# Altium PCB Memory Address Decoder.PcbDoc
Units mil, origin at the board's own origin, x right, y up, seen from the top; angles counter-clockwise.
Board outline 5200 x 2700 mil, 2 copper layers (Top Layer, Bottom Layer); 11 components, 64 nets, 176 pads, 0 vias.
Unrouted connection lines stored in the file: 84.
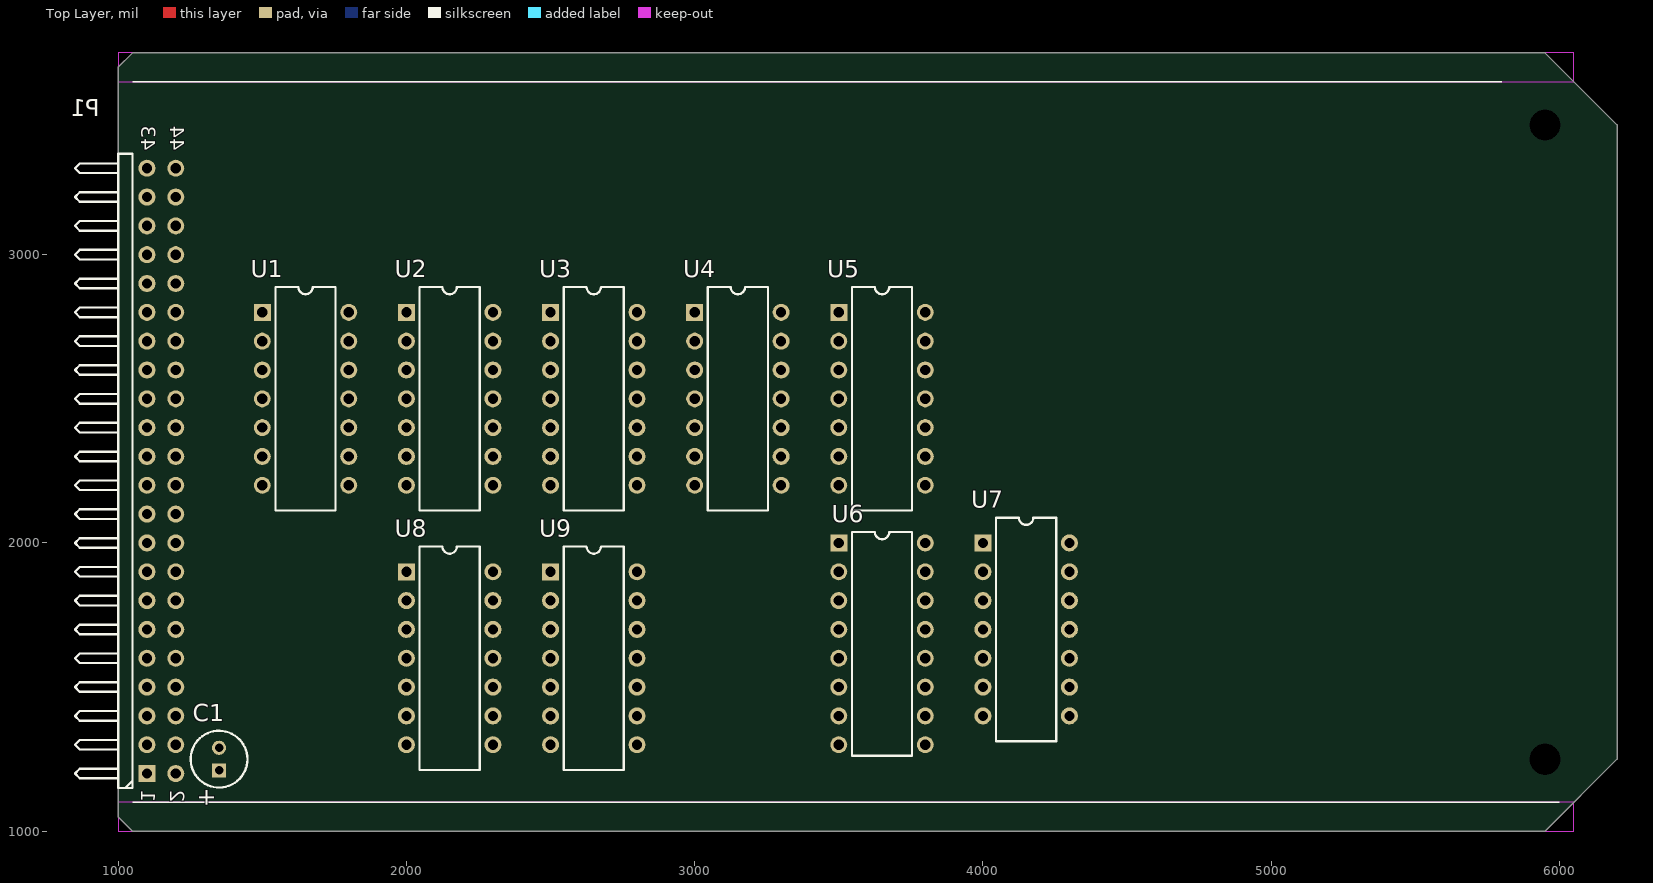
[diagram p0: Top Layer view]
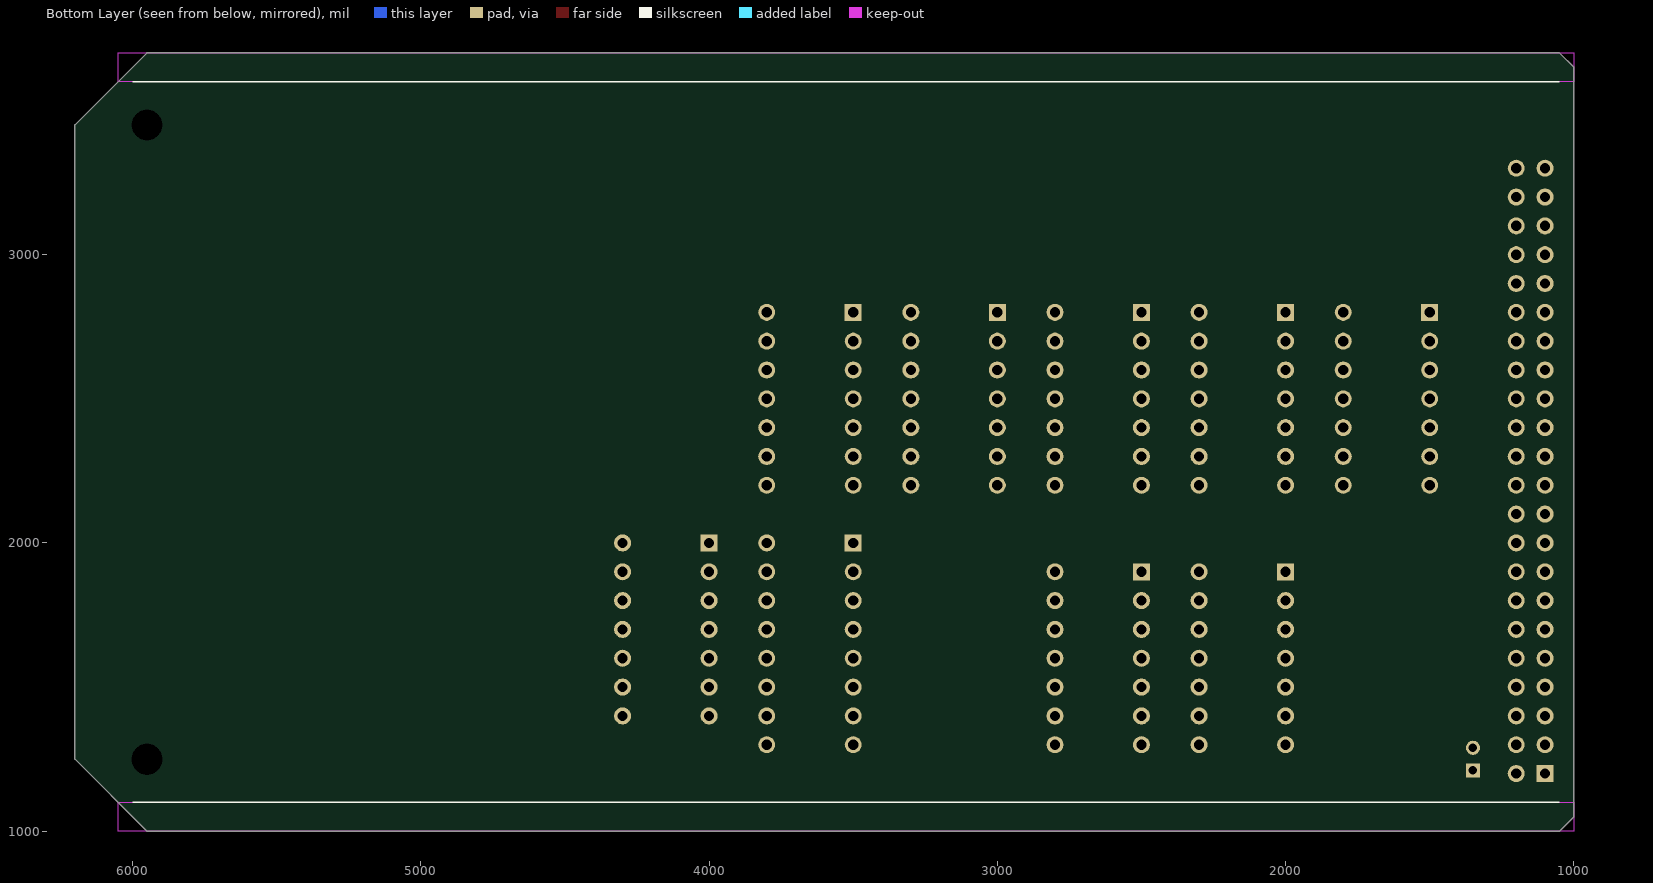
[diagram p1: Bottom Layer view, seen from below]

## Layer stack, top to bottom
Top Solder: solder mask 0.4, Solder Resist, Dk 3.5
Top Layer: signal copper 1.4
Dielectric 1: dielectric 12.6, FR-4, Dk 4.8
Bottom Layer: signal copper 1.4
Bottom Solder: solder mask 0.4, Solder Resist, Dk 3.5

## Board outline
1000,3650 1050,3700 5950,3700 6200,3450 6200,1250 5950,1000 1050,1000 1000,1050

## Design rules (kind name [scope] priority, off if disabled: settings)
Clearance [All] p1: gap=10 ignorepadtopadclearanceinfootprint=FALSE except(0: Arc-Hole Track-Hole SMDPad-Hole THPad-Hole Via-Hole Fill-Hole Poly-Hole Region-Hole Text-Hole)
PolygonConnect [All] p1: connectstyle=Relief reliefconductorwidth=10 reliefentries=4 polygonreliefangle="90 Angle" airgapwidth=10
RoutingVias "Schematic Routing Via Style" [InNetClass('PWR')] p1: holewidth=20 width=35 viastyle="Through Hole" minholewidth=20 minwidth=35 maxholewidth=20 maxwidth=50
RoutingVias [All] p2: holewidth=28 width=50 viastyle="Through Hole" minholewidth=28 minwidth=50 maxholewidth=28 maxwidth=50
SolderMaskExpansion [All] p1: expansion=4 istentingtop=FALSE
Width "Schematic Width Constraint" [InNetClass('PWR')] p1: maxlimit=50 minlimit=20 preferedwidth=20
Width [All] p2: maxlimit=10 minlimit=10 preferedwidth=10
30 further rules are at their usual default settings.

## Classes and differential pairs
net class PWR: GND VCC
net class ENN[5..12]: ENN5 ENN6 ENN7 ENN8 ENN9 ENN10 ENN11 ENN12
net class EN[1..20]: EN1 EN2 EN3 EN4 EN5 EN6 EN7 EN8 EN9 EN10 EN11 EN12 EN13 EN14 EN15 EN16 EN17 EN18 EN19 EN20
net class ADDR[0..19]: ADDR0 ADDR1 ADDR2 ADDR3 ADDR4 ADDR5 ADDR6 ADDR7 ADDR8 ADDR9 ADDR10 ADDR11 ADDR12 ADDR13 ADDR14 ADDR15 ADDR16 ADDR17 ADDR18 ADDR19
component class Top: C1 P1
component class Decode: U1 U2 U3 U4 U5 U6 U7 U8 U9

## Components (designator, comment, footprint, x,y, rotation, side; value= is the part's Value field where it differs from the comment)
C1 "Cap Pol5" C5x7 1350,1250 r90 top value=10uF
P1 "Memory Address Decoder" HDR2X22H 1100,1200 r90 top
U1 "SN74LS04N" N014 1650,2500 r270 top
U2 "SN74LS08N" N014 2150,2500 r270 top
U3 "SN74LS08N" N014 2650,2500 r270 top
U4 "SN74LS08N" N014 3150,2500 r270 top
U5 "SN74LS32N" N014 3650,2500 r270 top
U6 "SN74LS138N" N016 3650,1650 r270 top
U7 "SN74LS04N" N014 4150,1700 r270 top
U8 "SN74LS04N" N014 2150,1600 r270 top
U9 "SN74LS30N" N014 2650,1600 r270 top

## Footprints (in the part's own frame and the unit in brackets; to place one, negate y for a bottom-side part, rotate by r counter-clockwise, add the part's x,y. Pads: shape width x height; smd on the part's side, far side on the other; paste and mask are expansions set on the pad)
C5x7 [mm] "Capacitor; 2 Leads"
  rect 1.25x1.25 hole 0.75: 1(-1,0)
  round 1.25 hole 0.75: 2(1,0)
  silkscreen extent -2.5,-2.5 2.5,2.5, body extent -2.5,-2.5 2.5,2.5, height 7
HDR2X22H [mm] "Connector; Header; 22x2 Position; Right Angle"
  rect 1.5x1.5 hole 0.9: 1(0,0)
  round 1.5 hole 0.9: 2(0,-2.54) 3(2.54,0) 4(2.54,-2.54) 5(5.08,0) 6(5.08,-2.54) 7(7.62,0) 8(7.62,-2.54) 9(10.16,0) 10(10.16,-2.54) 11(12.7,0) 12(12.7,-2.54) 13(15.24,0) 14(15.24,-2.54) 15(17.78,0) 16(17.78,-2.54) 17(20.32,0) 18(20.32,-2.54) 19(22.86,0) 20(22.86,-2.54) 21(25.4,0) 22(25.4,-2.54) 23(27.94,0) 24(27.94,-2.54) 25(30.48,0) 26(30.48,-2.54) 27(33.02,0) 28(33.02,-2.54) 29(35.56,0) 30(35.56,-2.54) 31(38.1,0) 32(38.1,-2.54) 33(40.64,0) 34(40.64,-2.54) 35(43.18,0) 36(43.18,-2.54) 37(45.72,0) 38(45.72,-2.54) 39(48.26,0) 40(48.26,-2.54) 41(50.8,0) 42(50.8,-2.54) 43(53.34,0) 44(53.34,-2.54)
  silkscreen extent -1.27,1.27 54.61,6.35
N014 [mm] "DIP; 14 Leads; Row Spacing 7.62 mm; Pitch 2.54 mm"
  rect 1.5x1.5 hole 0.9: 1(-7.62,-3.81)
  round 1.5 hole 0.9: 2(-5.08,-3.81) 3(-2.54,-3.81) 4(0,-3.81) 5(2.54,-3.81) 6(5.08,-3.81) 7(7.62,-3.81) 8(7.62,3.81) 9(5.08,3.81) 10(2.54,3.81) 11(0,3.81) 12(-2.54,3.81) 13(-5.08,3.81) 14(-7.62,3.81)
  silkscreen extent -9.85,-2.65 9.85,2.65, body extent -9.15,-5.08 9.15,5.12, height 7.88
N016 [mm] "DIP; 16 Leads; Row Spacing 7.62 mm; Pitch 2.54 mm"
  rect 1.5x1.5 hole 0.9: 1(-8.89,-3.81)
  round 1.5 hole 0.9: 2(-6.35,-3.81) 3(-3.81,-3.81) 4(-1.27,-3.81) 5(1.27,-3.81) 6(3.81,-3.81) 7(6.35,-3.81) 8(8.89,-3.81) 9(8.89,3.81) 10(6.35,3.81) 11(3.81,3.81) 12(1.27,3.81) 13(-1.27,3.81) 14(-3.81,3.81) 15(-6.35,3.81) 16(-8.89,3.81)
  silkscreen extent -9.85,-2.65 9.85,2.65

## Part data
C1: "Polarized Capacitor", LatestRevisionDate=17-Jul-2002, LatestRevisionNote="Re-released for DXP Platform.", PackageDescription="Polarized Capacitor; 2 Leads", PackageReference=POLAR0.8, Published=8-Jun-2000, Publisher="Altium Limited"
P1: library part "Header 22X2H", "Header, 22-Pin, Dual row, Right Angle", LatestRevisionDate=17-Jul-2002, LatestRevisionNote="Re-released for DXP Platform.", Publisher="Altium Limited", System=Connector
U1 U7 U8: "Hex Inverter", ComponentLink1Description="Manufacturer Link", ComponentLink1URL=http://www.ti.com/, ComponentLink2Description=Datasheet, ComponentLink2URL=http://www-s.ti.com/sc/ds/sn74ls04.pdf, DatasheetVersion=Mar-1988, LatestRevisionDate=04-Mar-2005, LatestRevisionNote="Stylized 3D Model Added.", PackageDescription="DIP; 14 Leads; Row Spacing 7.62 mm; Pitch 2.54 mm", PackageReference=N014, PackageVersion=Oct-1995, Published=8-Jun-2000, Publisher="Altium Limited"
U2 U3 U4: "Quadruple 2-Input Positive-AND Gate", ComponentLink1Description="Manufacturer Link", ComponentLink1URL=http://www.ti.com/, ComponentLink2Description=Datasheet, ComponentLink2URL=http://www-s.ti.com/sc/ds/SN74LS08.pdf, DatasheetVersion=Mar-1988, LatestRevisionDate=04-Mar-2005, LatestRevisionNote="Stylized 3D Model Added.", PackageDescription="DIP; 14 Leads; Row Spacing 7.62 mm; Pitch 2.54 mm", PackageReference=N014, PackageVersion=Oct-1995, Published=8-Jun-2000, Publisher="Altium Limited"
U5: "Quadruple 2-Input Positive-OR Gate", ComponentLink1Description="Manufacturer Link", ComponentLink1URL=http://www.ti.com/, ComponentLink2Description=Datasheet, ComponentLink2URL=http://www-s.ti.com/sc/ds/sn74ls32.pdf, DatasheetVersion=Mar-1988, LatestRevisionDate=04-Mar-2005, LatestRevisionNote="Stylized 3D Model Added.", PackageDescription="DIP; 14 Leads; Row Spacing 7.62 mm; Pitch 2.54 mm", PackageReference=N014, PackageVersion=Oct-1995, Published=8-Jun-2000, Publisher="Altium Limited"
U6: "3-Line to 8-Line Decoder / Demultiplexer", Code_JEDEC=MS-001-BB, ComponentLink1Description="Manufacturer Link", ComponentLink1URL=http://www.ti.com/, ComponentLink2Description=Datasheet, ComponentLink2URL=http://www-s.ti.com/sc/ds/sn74ls138.pdf, DatasheetVersion=Mar-1988, LatestRevisionDate=04-Mar-2005, LatestRevisionNote="Stylized 3D Model Added.", PackageDescription="DIP; 16 Leads; Row Spacing 7.62 mm; Pitch 2.54 mm", PackageReference=N016, PackageVersion=Oct-1995, Published=8-Jun-2000, Publisher="Altium Limited"
U9: "8-Input Positive-NAND Gate", ComponentLink1Description="Manufacturer Link", ComponentLink1URL=http://www.ti.com/, ComponentLink2Description=Datasheet, ComponentLink2URL=http://www-s.ti.com/sc/ds/sn74s30.pdf, DatasheetVersion=Mar-1988, LatestRevisionDate=04-Mar-2005, LatestRevisionNote="Stylized 3D Model Added.", Note="Pins 9, 10  and 13 are NC & not drawn.", PackageDescription="DIP; 14 Leads; Row Spacing 7.62 mm; Pitch 2.54 mm", PackageReference=N014, PackageVersion=Oct-1995, Published=8-Jun-2000, Publisher="Altium Limited"

## Free pads (board coordinates)
  round 0 hole 109: ""(5950,1250) ""(5950,3450)

## Nets (pads, with @x,y where several pads share a name; then routed paths per layer and width w, separated by ;. In a path a pad name is that pad's centre, name@x,y a point inside that pad or via, vN(x,y) a via of type N, cw(c..) or ccw(c..) an arc to the next point about the centre after c; other vN are vias at no path point)
ADDR0: P1.6
ADDR1: P1.8
ADDR2: P1.10
ADDR3: P1.12
ADDR4: P1.14
ADDR5: P1.16
ADDR6: P1.18
ADDR7: P1.20 U6.1
ADDR8: P1.22 U6.2
ADDR9: P1.24 U6.3
ADDR10: P1.26 U1.13 U9.6
ADDR11: P1.28 U1.11 U3.13 U9.5
ADDR12: P1.30 U1.9 U3.2 U9.4
ADDR13: P1.32 U1.5 U2.13 U9.3
ADDR14: P1.34 U1.3 U2.2 U9.2
ADDR15: P1.36 U1.1 U2.1 U2.9 U9.1
ADDR16: P1.38
ADDR17: P1.40
ADDR18: P1.42
ADDR19: P1.44
EN1: P1.5 U1.2
EN2: P1.7 U5.6
EN3: P1.9 U3.6
EN4: P1.11 U4.3
EN5: P1.13 U7.2
EN6: P1.15 U7.4
EN7: P1.17 U7.6
EN8: P1.19 U7.8
EN9: P1.21 U7.10
EN10: P1.23 U7.12
EN11: P1.25 U8.2
EN12: P1.27 U8.4
EN13: P1.29
EN14: P1.31
EN15: P1.33
EN16: P1.35
EN17: P1.37
EN18: P1.39
EN19: P1.41
EN20: P1.43
ENN5: U6.15 U7.1
ENN6: U6.14 U7.3
ENN7: U6.13 U7.5
ENN8: U6.12 U7.9
ENN9: U6.11 U7.11
ENN10: U6.10 U7.13
ENN11: U6.9 U8.1
ENN12: U6.7 U8.3
GND: C1.2 P1.3 P1.4 U1.7 U2.7 U3.7 U4.7 U5.7 U6.5 U6.8 U7.7 U8.7 U9.7
NetU1_4: U1.4 U2.10
NetU1_6: U1.6 U2.5
NetU1_8: U1.8 U3.10
NetU1_10: U1.10 U3.5
NetU1_12: U1.12 U4.2
NetU2_3: U2.3 U2.4 U2.12
NetU2_6: U2.6 U5.2
NetU2_8: U2.8 U5.1
NetU2_11: U2.11 U3.1 U3.9
NetU3_3: U3.3 U3.4 U3.12
NetU3_8: U3.8 U5.5
NetU3_11: U3.11 U4.1
NetU5_3: U5.3 U5.4
NetU6_4: U6.4 U9.8
VCC: C1.1 P1.1 P1.2 U1.14 U2.14 U3.14 U4.14 U5.14 U6.6 U6.16 U7.14 U8.14 U9.11 U9.12 U9.14
pads on no net: U4.4 U4.5 U4.6 U4.8 U4.9 U4.10 U4.11 U4.12 U4.13 U5.8 U5.9 U5.10 U5.11 U5.12 U5.13 U8.5 U8.6 U8.8 U8.9 U8.10 U8.11 U8.12 U8.13 U9.9 U9.10 U9.13

## Keep-outs
Top Layer:
  rectangle: 1000,1000 6050,1100
  rectangle: 1000,3600 6050,3700
Bottom Layer:
  rectangle: 1000,3600 6050,3700
  rectangle: 1000,1000 6050,1100

## Silkscreen, mask and mechanical layers (free items; w line width, h text height)
Top Overlay:
  lines w5: 1050,1100 6000,1100 ; 1050,3600 5800,3600
Bottom Overlay:
  lines w5: 1050,1100 6000,1100 ; 1050,3600 6000,3600

## Text inside footprints (layer, text, board x,y; h text height)
C1: Top Overlay "+" at 1281.11,1151.57 h59.06 r270
P1: Top Overlay "44" at 1180,3360 h50 r270; Top Overlay "43" at 1080,3360 h50 r270; Top Overlay "1" at 1080,1100 h50 r270; Top Overlay "2" at 1180,1100 h50 r270